# Altium PCB OSU_KBD.PcbDoc
Units mil, origin at the board's own origin, x right, y up, seen from the top; angles counter-clockwise.
Board outline 2362.2 x 2165.35 mil, 2 copper layers (Top Layer, Bottom Layer); 27 components, 22 nets, 142 pads, 14 vias.
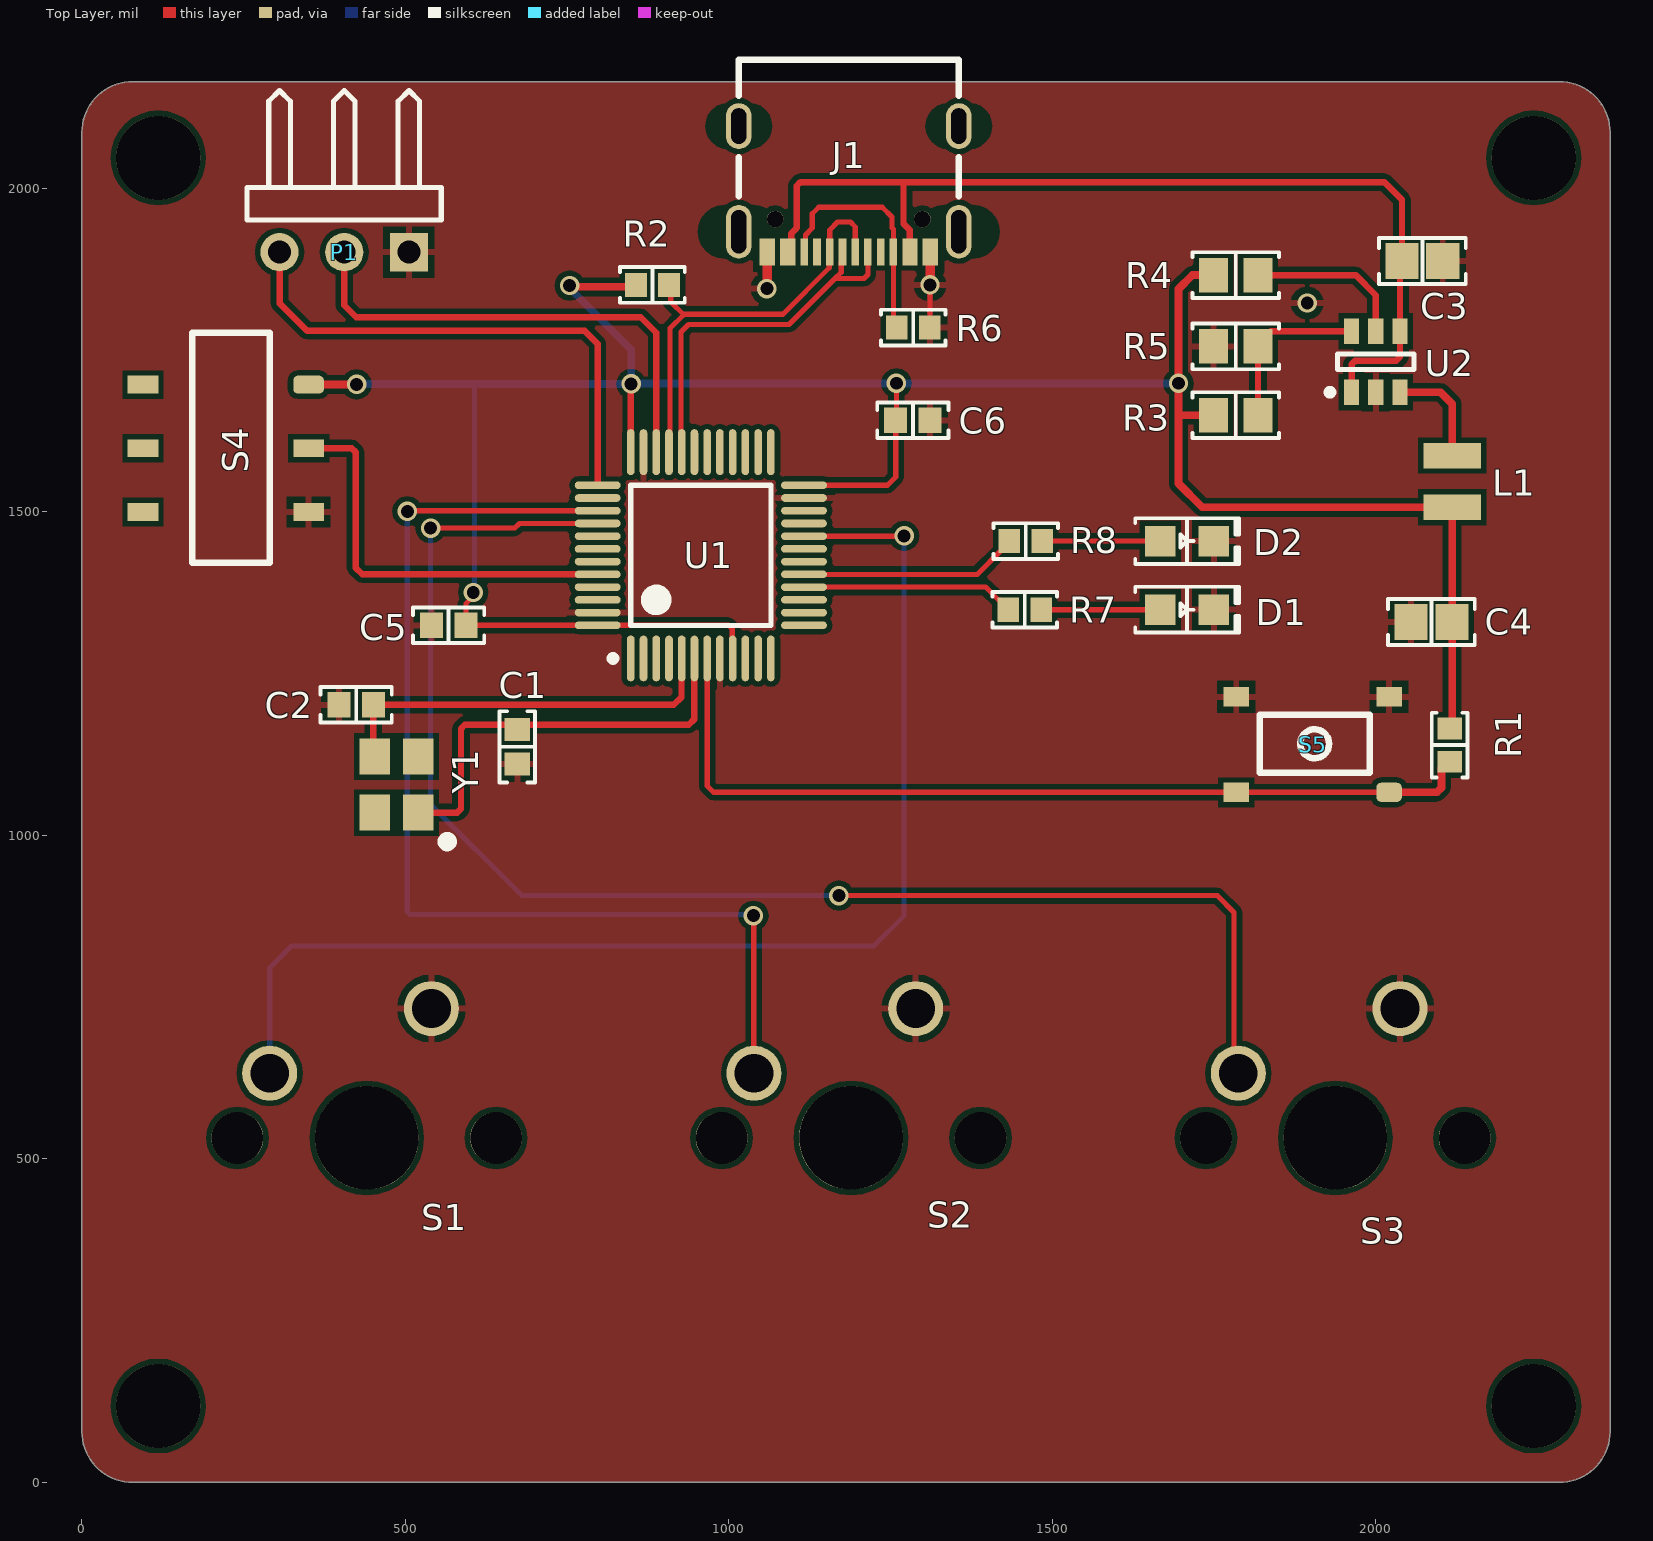
[diagram p0: Top Layer view]
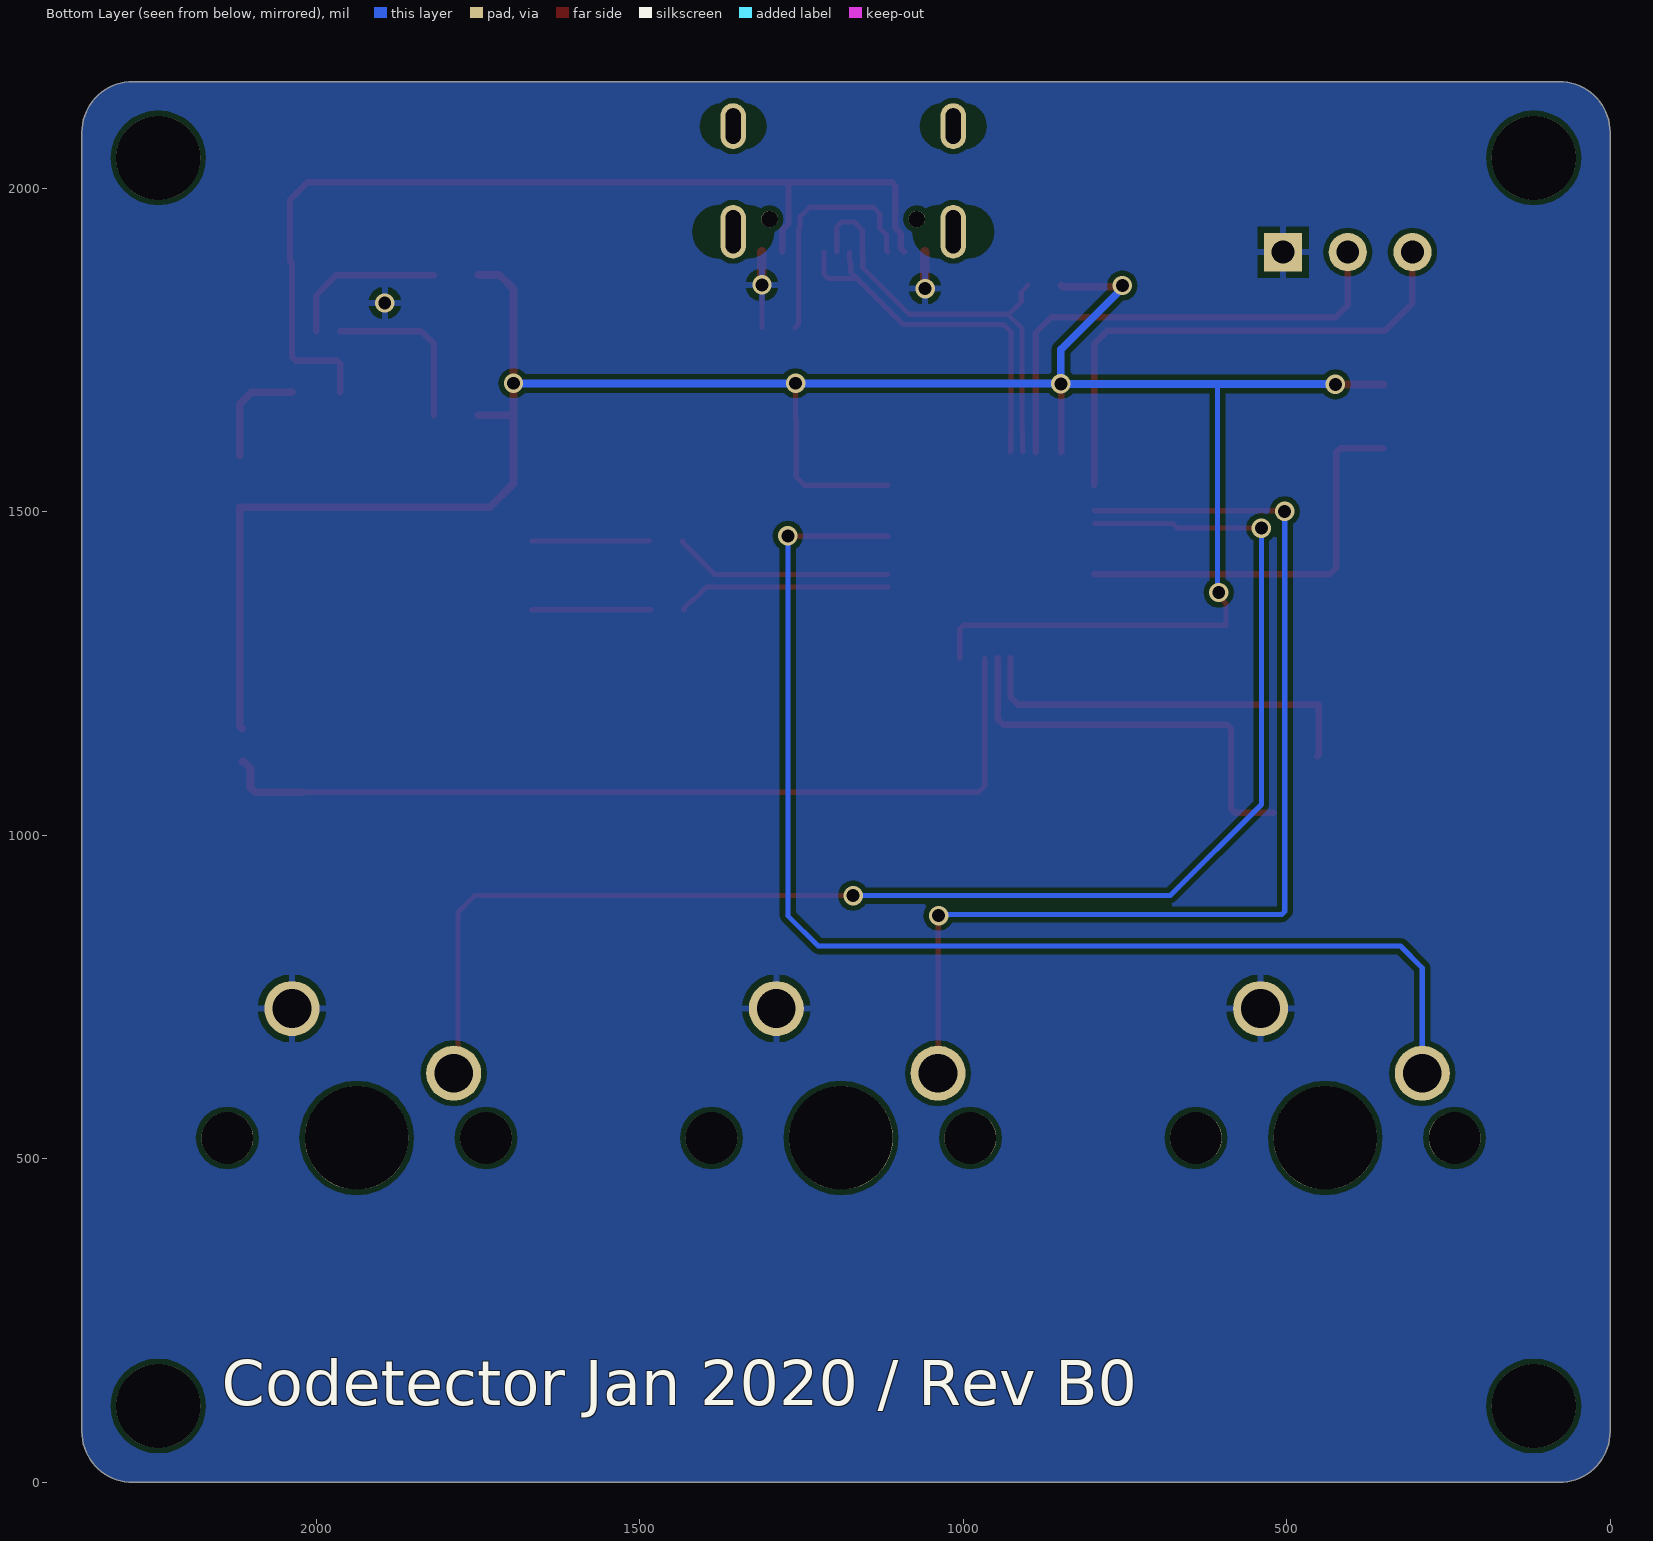
[diagram p1: Bottom Layer view, seen from below]
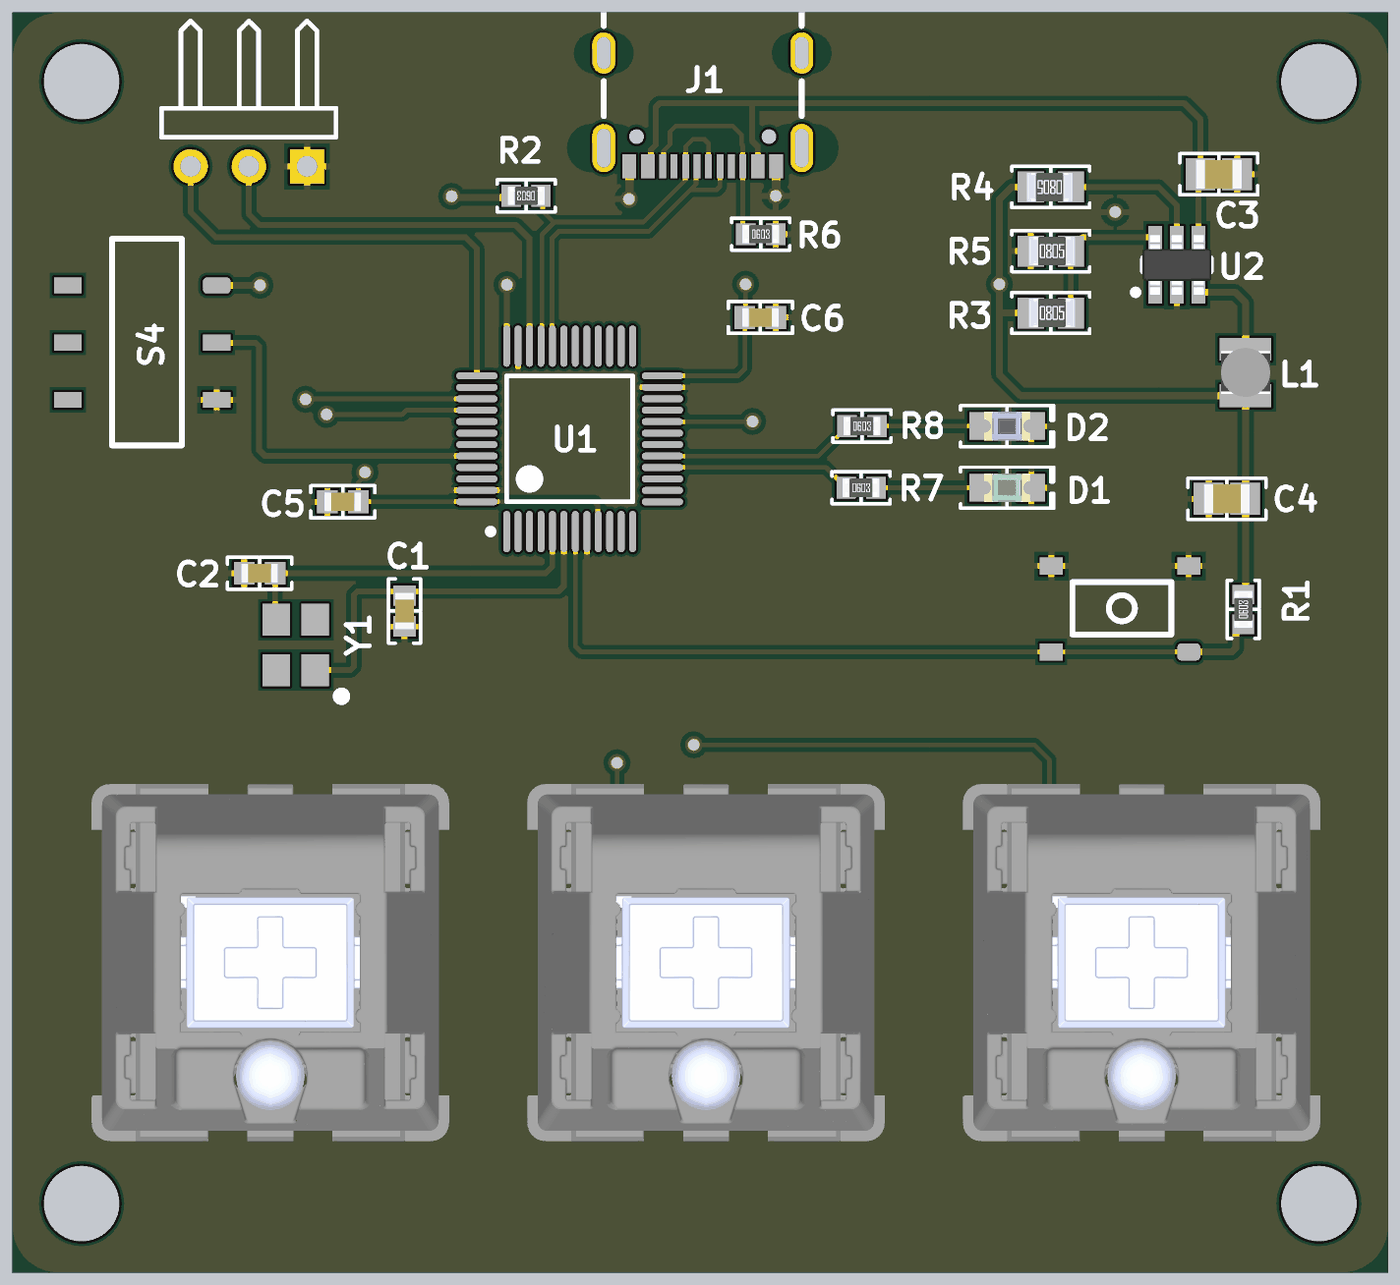
[diagram p2: 3D render of the assembled board from above, using the file's embedded part models]

## Layer stack, top to bottom
Top Solder: solder mask 0.4, Solder Resist, Dk 3.5
Top Layer: signal copper 1.4
Dielectric 1: dielectric 12.6, FR-4, Dk 4.8
Bottom Layer: signal copper 1.4
Bottom Solder: solder mask 0.4, Solder Resist, Dk 3.5

## Board outline
0,78.74 ccw(c78.74,78.74) 78.74,0 2283.46,0 ccw(c2283.46,78.74) 2362.2,78.74 2362.2,2086.61 ccw(c2283.46,2086.61) 2283.46,2165.35 78.74,2165.35 ccw(c78.74,2086.61) 0,2086.61

## Design rules (kind name [scope] priority, off if disabled: settings)
AssemblyTestPointUsage [All] p1: valid=2
Clearance [All] p1: gap=8 ignorepadtopadclearanceinfootprint=TRUE
DiffPairsRouting [All] p1: maxlimit=10 minlimit=8 mostfreqgap=10 toplayer_minwidth=8 toplayer_maxwidth=15 toplayer_prefwidth=10 bottomlayer_minwidth=8 bottomlayer_maxwidth=15 bottomlayer_prefwidth=10 maxuncoupledlength=500
FabricationTestPointUsage [All] p1: valid=2 allowmultiple=FALSE
HoleSize [All] p1: absolutevalues=TRUE maxlimit=500 minlimit=1 maxpercent=80.000 minpercent=20.000
MinimumSolderMaskSliver [All] p1: minsoldermaskwidth=0
PolygonConnect [All] p1: connectstyle=Relief reliefconductorwidth=10 reliefentries=4 polygonreliefangle="90 Angle" airgapwidth=10
RoomDefinition osu_keyboard [InComponentClass('osu_keyboard')] p1: selectionmemoryflags=8 confinementstyle=ConfineIn formatcopy=TRUE lockcomponents=FALSE outline 55.12,94.49 2259.84,94.49 2259.84,2216.54 55.12,2216.54
RoutingVias [All] p1: holewidth=20 width=30 viastyle="Through Hole" minholewidth=14 minwidth=28 maxholewidth=30 maxwidth=50
SilkToSilkClearance [All] p1: silktosilkclearance=5
SilkToSolderMaskClearance [IsPad] p1: minsilkscreentomaskgap=1 clearancetoexposedcopper=TRUE
SolderMaskExpansion [All] p1: expansion=4 istentingtop=FALSE
Width [All] p1: maxlimit=30 minlimit=8 preferedwidth=10 minimp=50.000000 maximp=50.000000 favimp=50.000000
23 further rules are at their usual default settings.

## Classes and differential pairs
differential pair USBD: +USBD_P -USBD_N

## Components (designator, comment, footprint, x,y, rotation, side; value= is the part's Value field where it differs from the comment)
C1 "22pF" "CAP 0603/1608" 673,1137 r90 top
C2 "22pF" "CAP 0603/1608" 424,1202 r180 top
C3 "10uF" "CAP 0805/2012" 2072,1888 r180 top
C4 "22uF" "CAP 0805/2012" 2086,1330 r0 top
C5 "0.1uF" "CAP 0603/1608" 566.93,1324.8 r0 top
C6 "0.1uF" "CAP 0603/1608" 1284.45,1641.73 r180 top
D1 "Green" "LED 0805/2012 GREEN" 1708.31,1349 r0 top
D2 "Blue" "LED 0805/2012 BLUE" 1708.31,1455 r0 top value=Green
J1 "USB Type C Female" "USB Type C Female" 1185.43,1933.07 r180 top
L1 "2.2 uH" INDP1722X10N 2118.11,1547.24 r270 top
P1 "Header 3H" HDR1X3H 505.51,1901.57 r180 top
R1 "1k" "RES 0603/1608" 2114.17,1139.76 r90 top
R2 "1.5k" "RES 0603/1608" 882,1851 r180 top
R3 "20k" "RES 0805/2012" 1783.46,1649.61 r0 top
R4 "10k" "RES 0805/2012" 1783.46,1866.14 r180 top
R5 "4.42k" "RES 0805/2012" 1783.46,1755.91 r0 top
R6 "1k" "RES 0603/1608" 1285,1785 r0 top
R7 "330" "RES 0603/1608" 1457.41,1349 r0 top
R8 "330" "RES 0603/1608" 1459,1455 r0 top
S1 "CherryMXSwitch" CherryMX 440.35,532.48 r0 top
S2 "CherryMXSwitch" CherryMX 1188.88,532.48 r0 top
S3 "CherryMXSwitch" CherryMX 1937.4,532.48 r0 top
S4 "XKB-SK3245S-L3-A" XKB-SK-3245S 350.39,1696.85 r270 top
S5 "XKB-TS-1187A" XKB-RS-1187A 1905.51,1141.73 r180 top
U1 "STM32F103C8T6" STM-LQFP48_N 956.69,1433.07 r90 top
U2 "JW5223" SOT23-6N 2000,1732.28 r90 top
Y1 "8MHz" TAXM_SMD_CRYSTAL 519.68,1035.43 r90 top

## Footprints (in the part's own frame and the unit in brackets; to place one, negate y for a bottom-side part, rotate by r counter-clockwise, add the part's x,y. Pads: shape width x height; smd on the part's side, far side on the other; paste and mask are expansions set on the pad)
"CAP 0603/1608" [mm] "Chip Capacitor, 2-Leads, Body 1.60x0.80mm, IPC Medium Density"
  rect 0.9x1 smd: 1(-0.675,0) 2(0.675,0)
  silkscreen extent -1.4,-0.7 1.4,0.7, body extent -0.8,-0.41 0.8,0.41, height 0.82
"CAP 0805/2012" [mm] "Chip Capacitor, 2-Leads, Body 2.00x1.20mm, IPC Medium Density"
  rect 1.3x1.4 smd: 1(-0.8,0) 2(0.8,0)
  silkscreen extent -1.7,-0.9 1.7,0.9, body extent -1,-0.64 1,0.64, height 1.26
CherryMX [mil]
  round 85 hole 60: 1(-150,100) 2(100,200)
  round 80 hole 80 unplated: ""(-200,0) ""(200,0)
  round 160 hole 160 unplated: ""(0,0)
  body extent -305,-307 309,307, height 620
HDR1X3H [mm] "Connector; Header; 3 Position; Right Angle"
  rect 1.5x1.5 hole 0.9: 1(0,0)
  round 1.5 hole 0.9: 2(2.54,0) 3(5.08,0)
  silkscreen extent -1.27,-6.35 6.35,-1.27
INDP1722X10N [mm] "Precision Wire Wound Inductor, 2-Leads, Body 1.67x2.15mm, IPC Medium Density"
  rect 1x2.25 smd: 1(-1.016,0) 2(1.016,0)
  body extent -1.07,-1.07 1.07,1.07, height 1.1
"LED 0805/2012 BLUE" [mm] "Chip Diode, 2-Leads, Body 2.00x1.25mm, IPC Medium Density"
  rect 1.2x1.2 smd: 1(-1.05,0) 2(1.05,0)
  silkscreen extent -2.03,-0.9 2.03,0.9, body extent -1,-0.62 1,0.63, height 0.9
"LED 0805/2012 GREEN" [mm] "Chip Diode, 2-Leads, Body 2.00x1.25mm, IPC Medium Density"
  rect 1.2x1.2 smd: 1(-1.05,0) 2(1.05,0)
  silkscreen extent -2.03,-0.9 2.03,0.9, body extent -1,-0.62 1,0.63, height 0.9
"RES 0603/1608" [mm] "Chip Resistor, 2-Leads, Body 1.60x0.80mm, IPC Medium Density"
  rect 0.85x0.95 smd: 1(-0.65,0) 2(0.65,0)
  silkscreen extent -1.27,-0.7 1.27,0.7, body extent -0.8,-0.4 0.8,0.4, height 0.45
"RES 0805/2012" [mm] "Chip Resistor, 2-Leads, Body 2.00x1.25mm, IPC Medium Density"
  rect 1.15x1.35 smd: 1(-0.875,0) 2(0.875,0)
  silkscreen extent -1.7,-0.9 1.7,0.9, body extent -0.95,-0.62 1.05,0.63, height 0.6
SOT23-6N [mm] "SOT23, 6-Leads, Body 2.90x2.45mm, Pitch 0.95mm, IPC Medium Density"
  rect 1x0.6 smd: 1(-1.2,0.95) 2(-1.2,0) 3(-1.2,-0.95) 4(1.2,-0.95) 5(1.2,0) 6(1.2,0.95)
  silkscreen extent -1.32,-1.5 0.3,1.92, body extent -1.3,-1.5 1.3,1.5, height 1.1
STM-LQFP48_N [mm] "QFP, 48-Leads, Body 7x7mm, Pitch 0.5mm, IPC Medium Density"
  oval 1.8x0.3 smd: 1(-4.05,2.75) 2(-4.05,2.25) 3(-4.05,1.75) 4(-4.05,1.25) 5(-4.05,0.75) 6(-4.05,0.25) 7(-4.05,-0.25) 8(-4.05,-0.75) 9(-4.05,-1.25) 10(-4.05,-1.75) 11(-4.05,-2.25) 12(-4.05,-2.75) 25(4.05,-2.75) 26(4.05,-2.25) 27(4.05,-1.75) 28(4.05,-1.25) 29(4.05,-0.75) 30(4.05,-0.25) 31(4.05,0.25) 32(4.05,0.75) 33(4.05,1.25) 34(4.05,1.75) 35(4.05,2.25) 36(4.05,2.75)
  oval 0.3x1.8 smd: 13(-2.75,-4.05) 14(-2.25,-4.05) 15(-1.75,-4.05) 16(-1.25,-4.05) 17(-0.75,-4.05) 18(-0.25,-4.05) 19(0.25,-4.05) 20(0.75,-4.05) 21(1.25,-4.05) 22(1.75,-4.05) 23(2.25,-4.05) 24(2.75,-4.05) 37(2.75,4.05) 38(2.25,4.05) 39(1.75,4.05) 40(1.25,4.05) 41(0.75,4.05) 42(0.25,4.05) 43(-0.25,4.05) 44(-0.75,4.05) 45(-1.25,4.05) 46(-1.75,4.05) 47(-2.25,4.05) 48(-2.75,4.05)
  silkscreen extent -4.17,-2.75 2.75,3.57, body extent -3.5,-3.5 3.5,3.5, height 1.6
TAXM_SMD_CRYSTAL [mm]
  rect 1.4x1.2 smd: 1(0,0) 2(2.2,0) 3(2.2,1.7) 4(0,1.7)
  silkscreen extent -1.32,-1.32 -0.96,-0.96
"USB Type C Female" [mm]
  rect 0.6x1.05 smd mask+0.09: 1(-3.2,0.791) 2(-2.4,0.791) 11(2.4,0.791) 12(3.2,0.791)
  rect 0.3x1.05 smd mask+0.09: 3(-1.75,0.791) 4(-1.25,0.791) 5(-0.75,0.791) 6(-0.25,0.791) 7(0.25,0.791) 8(0.75,0.791) 9(1.25,0.791) 10(1.75,0.791)
  oval 1x2.1 hole 1.7 slot 0.6 at 0 deg: ""(-4.32,0) ""(4.32,0)
  oval 1x1.8 hole 1.4 slot 0.6 at 0 deg: ""(-4.32,-4.15) ""(4.32,-4.15)
  round 0.65 hole 0.65 unplated: ""(-2.89,-0.5) ""(2.89,-0.5)
  silkscreen extent -4.32,-6.75 4.32,-1.4
XKB-RS-1187A [mm]
  rrect50% 1x0.75 smd: 1(-2.921,1.905)
  rect 1x0.75 smd: 2(3.079,1.905) 3(-2.921,-1.845) 4(3.079,-1.845)
  silkscreen extent -2.16,-1.14 2.16,1.14
XKB-SK-3245S [mm]
  rrect50% 0.7x1.2 smd: 1(0,0)
  rect 0.7x1.2 smd: 2(2.5,0) 3(5,0) 4(0,-6.5) 5(2.5,-6.5) 6(5,-6.5)
  silkscreen extent -2.03,-4.57 6.99,-1.52

## Part data
C1 C2: library part C1608C0G1H220J080AA, "CAP CER 22PF 50V C0G 0603", Device Package="0603 (1608 Metric)", Manufacturer="TDK Corporation", Supplier Part Number 1=445-1273-1-ND, TemperatureCoefficient="C0G, NP0", TemperatureRange="-55C ~ 125C", Tolerance=5%, Voltage=50V, ComponentLink1Description=Datasheet, ComponentLink1URL=https://product.tdk.com/info/en/catalog/datasheets/mlcc_commercial_general_en.pdf, ComponentLink2Description="Digi-Key listing", ComponentLink2URL=http://digikey.com/product-detail/en/C1608C0G1H220J080AA/445-1273-1-ND/567670, Part Number=C1608C0G1H220J080AA, PartId=4031, Price=0.14, Supplier 1=Digi-Key, Type=-
C3: library part C2012X5R0J106K125AB, "CAP CER 10UF 6.3V X5R 0805", Device Package="0805 (2012 Metric)", Manufacturer="TDK Corporation", Supplier Part Number 1=445-4113-2-ND, TemperatureCoefficient=X5R, TemperatureRange="-55C ~ 85C", Tolerance=10%, Voltage=6.3V, ComponentLink1Description=Datasheet, ComponentLink1URL=https://product.tdk.com/info/en/catalog/datasheets/mlcc_commercial_general_en.pdf, ComponentLink2Description="Digi-Key listing", ComponentLink2URL=http://digikey.com/product-detail/en/C2012X5R0J106K125AB/445-4113-2-ND/1975460, Part Number=C2012X5R0J106K125AB, PartId=4503, Price=0.0486, Supplier 1=Digi-Key, Type=-
C4: library part C0805C226M9PACTU, "CAP CER 22UF 6.3V X5R 0805", Device Package="0805 (2012 Metric)", Manufacturer=Kemet, Supplier Part Number 1=399-4696-2-ND, TemperatureCoefficient=X5R, TemperatureRange="-55C ~ 85C", Tolerance=20%, Voltage=6.3V, ComponentLink1Description=Datasheet, ComponentLink1URL=http://www.kemet.com/docfinder?Partnumber=C0805C226M9PACTU, ComponentLink2Description="Digi-Key Listing", ComponentLink2URL=https://www.digikey.com/product-detail/en/kemet/C0805C226M9PACTU/399-4696-2-ND/992189, Part Number=C0805C226M9PACTU, PartId=13904, Price=0.076, Supplier 1=Digi-Key
C5 C6: library part C1608X7R1E104K080AA, "CAP CER 0.1UF 25V X7R 0603", Device Package="0603 (1608 Metric)", Manufacturer="TDK Corporation", Supplier Part Number 1=445-1316-1-ND, TemperatureCoefficient=X7R, TemperatureRange="-55C ~ 125C", Tolerance=10%, Voltage=25V, ComponentLink1Description=Datasheet, ComponentLink1URL=https://product.tdk.com/info/en/catalog/datasheets/mlcc_commercial_general_en.pdf, ComponentLink2Description="Digi-Key listing", ComponentLink2URL=http://digikey.com/product-detail/en/C1608X7R1E104K080AA/445-1316-1-ND/567697, Part Number=C1608X7R1E104K080AA, PartId=4029, Price=0.14, Supplier 1=Digi-Key, Type=-
D1: library part LTST-C171KGKT, "LED GREEN CLEAR 0805 SMD", Current (Test)=20mA, Device Package="0805 (2012 Metric)", Manufacturer="Lite-On Inc.", Supplier Part Number 1=160-1426-2-ND, Voltage Forward=2V, Colour=Green, ComponentLink1Description=Datasheet, ComponentLink1URL=http://optoelectronics.liteon.com/upload/download/DS22-2000-118/S_110_LTST-C171KGKT.pdf, ComponentLink2Description="Digi-Key Listing", ComponentLink2URL=http://www.digikey.ca/product-detail/en/LTST-C171KGKT/160-1426-2-ND/386799, Lens Transparency=Clear, Millicandela=35mcd, Part Number=LTST-C171KGKT, PartId=7080, Price=0.0638, Supplier 1=Digi-Key, Type="Surface Mount", Viewing Angle=130
D2: library part LTST-C171TBKT, "LED BLUE CLEAR 0805 SMD", Current (Test)=20mA, Device Package="0805 (2012 Metric)", Manufacturer="Lite-On Inc.", Supplier Part Number 1=160-1645-2-ND, Voltage Forward=3.3V, Colour=Blue, ComponentLink1Description=Datasheet, ComponentLink1URL=http://optoelectronics.liteon.com/upload/download/DS22-2000-233/S_110_LTST-C171TBKT(0630).pdf, ComponentLink2Description="Digi-Key Listing", ComponentLink2URL=http://www.digikey.ca/product-detail/en/LTST-C171TBKT/160-1645-2-ND/388528, Lens Transparency=Clear, Millicandela=104mcd, Part Number=LTST-C171TBKT, PartId=7084, Price=0.0939, Supplier 1=Digi-Key, Type="Surface Mount", Viewing Angle=130
L1: library part UHP252010NF, "Inductor 2.2uH"
P1: "Header, 3-Pin, Right Angle", LatestRevisionDate=17-Jul-2002, LatestRevisionNote="Re-released for DXP Platform.", Publisher="Altium Limited"
R1: library part ERJ-3EKF1001V, "RES SMD 1K OHM 1% 1/10W 0603", Device Package="0603 (1608 Metric)", Manufacturer="Panasonic Electronic Components", PowerRating="0.1W, 1/10W", Supplier Part Number 1=P1.00KHTR-ND, TemperatureCoefficient=100ppm/C, TemperatureRange="-55C ~ 155C", Tolerance=1%, ComponentLink1Description=Datasheet, ComponentLink1URL=http://industrial.panasonic.com/www-cgi/jvcr13pz.cgi?E+PZ+3+AOA0002+ERJ3EKF1001V+7+WW, ComponentLink2Description="Digi-Key listing", ComponentLink2URL=http://digikey.com/product-detail/en/ERJ-3EKF1001V/P1.00KHTR-ND/196032, Part Number=ERJ-3EKF1001V, PartId=885, Price=0.0038, Supplier 1=Digi-Key, Type="Thick Film"
R2: library part ERA-3ARW152V, "RES SMD 1.5KOHM 0.05% 1/10W 0603", Device Package="0603 (1608 Metric)", Manufacturer="Panasonic Electronic Components", PowerRating="0.1W, 1/10W", Supplier Part Number 1=P1.5KBETR-ND, TemperatureCoefficient=10ppm/C, TemperatureRange="-55C ~ 155C", Tolerance=0.05%, ComponentLink1Description=Datasheet, ComponentLink1URL=http://industrial.panasonic.com/lecs/www-data/pdf/AOA0000/AOA0000CE26.pdf, ComponentLink2Description="Digi-Key listing", ComponentLink2URL=http://digikey.com/product-detail/en/ERA-3ARW152V/P1.5KBETR-ND/3073692, Part Number=ERA-3ARW152V, PartId=1863, Price=0.3659, Supplier 1=Digi-Key, Type="Thin Film"
R3: library part ERA-6AEB203V, "RES SMD 20K OHM 0.1% 1/8W 0805", Device Package="0805 (2012 Metric)", Manufacturer="Panasonic Electronic Components", PowerRating="0.125W, 1/8W", Supplier Part Number 1=P20KDATR-ND, TemperatureCoefficient=25ppm/C, TemperatureRange="-55C ~ 155C", Tolerance=0.1%, ComponentLink1Description=Datasheet, ComponentLink1URL=http://industrial.panasonic.com/lecs/www-data/pdf/AOA0000/AOA0000CE26.pdf, ComponentLink2Description="Digi-Key listing", ComponentLink2URL=http://digikey.com/product-detail/en/ERA-6AEB203V/P20KDATR-ND/1465780, Part Number=ERA-6AEB203V, PartId=2456, Price=0.0653, Supplier 1=Digi-Key, Type="Thin Film"
R4: library part ERA-6AEB103V, "RES SMD 10K OHM 0.1% 1/8W 0805", Device Package="0805 (2012 Metric)", Manufacturer="Panasonic Electronic Components", PowerRating="0.125W, 1/8W", Supplier Part Number 1=P10KDATR-ND, TemperatureCoefficient=25ppm/C, TemperatureRange="-55C ~ 155C", Tolerance=0.1%, ComponentLink1Description=Datasheet, ComponentLink1URL=http://industrial.panasonic.com/lecs/www-data/pdf/AOA0000/AOA0000CE26.pdf, ComponentLink2Description="Digi-Key listing", ComponentLink2URL=http://digikey.com/product-detail/en/ERA-6AEB103V/P10KDATR-ND/1465773, Part Number=ERA-6AEB103V, PartId=2446, Price=0.0653, Supplier 1=Digi-Key, Type="Thin Film"
R5: library part ERA-6AEB4421V, "RES SMD 4.42K OHM 0.1% 1/8W 0805", Device Package="0805 (2012 Metric)", Manufacturer="Panasonic Electronic Components", PowerRating="0.125W, 1/8W", Supplier Part Number 1=P4.42KDATR-ND, TemperatureCoefficient=25ppm/C, TemperatureRange="-55C ~ 155C", Tolerance=0.1%, ComponentLink1Description=Datasheet, ComponentLink1URL=http://industrial.panasonic.com/lecs/www-data/pdf/AOA0000/AOA0000CE26.pdf, ComponentLink2Description="Digi-Key listing", ComponentLink2URL=http://digikey.com/product-detail/en/ERA-6AEB4421V/P4.42KDATR-ND/2025721, Part Number=ERA-6AEB4421V, PartId=2618, Price=0.0653, Supplier 1=Digi-Key, Type="Thin Film"
R6: library part ERJ-3EKF1001V, "RES SMD 1K OHM 1% 1/10W 0603", Manufacturer="Panasonic Electronic Components", PowerRating="0.1W, 1/10W", Supplier Part Number 1=P1.00KHTR-ND, TemperatureCoefficient=100ppm/C, TemperatureRange="-55C ~ 155C", Tolerance=1%, ComponentLink1Description=Datasheet, ComponentLink1URL=http://industrial.panasonic.com/www-cgi/jvcr13pz.cgi?E+PZ+3+AOA0002+ERJ3EKF1001V+7+WW, ComponentLink2Description="Digi-Key listing", ComponentLink2URL=http://digikey.com/product-detail/en/ERJ-3EKF1001V/P1.00KHTR-ND/196032, Part Number=ERJ-3EKF1001V, PartId=885, Price=0.0038, Supplier 1=Digi-Key, Type="Thick Film"
R7 R8: library part ERJ-PA3F3300V, "RES SMD 330 OHM 1% 1/4W 0603", Device Package="0603 (1608 Metric)", Manufacturer="Panasonic Electronic Components", PowerRating="0.25W, 1/4W", Supplier Part Number 1=P330BYTR-ND, TemperatureCoefficient=100ppm/C, TemperatureRange="-55C ~ 155C", Tolerance=1%, ComponentLink1Description=Datasheet, ComponentLink1URL=http://industrial.panasonic.com/www-cgi/jvcr17pz.cgi?E+PZ+4+AOA0004+ERJPA3F3300V+WW, ComponentLink2Description="Digi-Key listing", ComponentLink2URL=http://digikey.com/product-detail/en/ERJ-PA3F3300V/P330BYTR-ND/5035908, Part Number=ERJ-PA3F3300V, PartId=1800, Price=0.0255, Supplier 1=Digi-Key, Type="Thick Film"
S1 S2 S3: "CherryMX Switch"
S4: "Toggle Switch"
S5: "Push Button"
U1: "ARM Cortex-M3 32-bit MCU, 64 KB Flash, 20 KB Internal RAM, 37 I/Os, 48-pin LQFP, -40 to 85 degC, Tray", I/Os (High Current)=37, Operating Frequency(F) (Processor speed) (MHz)=72, Supplier Part Number 1=497-6063-ND, Supply Voltage(Vcc) min (V)=2, A/D Converter="2x12-bit (10 Channel)", ComponentLink1Description="Manufacturer URL", ComponentLink1URL=http://www.st.com/web/en/home.html, ComponentLink2Description=Datasheet, ComponentLink2URL=http://www.st.com/st-web-ui/static/active/en/resource/technical/document/datasheet/CD00161566.pdf, ComponentLink3Description="Package Specification", ComponentLink3URL=http://www.st.com/st-web-ui/static/active/en/resource/technical/document/datasheet/DM00058181.pdf, Core="ARM Cortex-M3", DatasheetVersion="Rev. 16", FLASH Size (Prog) (kB)=64, Internal RAM Size (kB)=20, Mounting Technology="Surface Mount", PackageDescription="48-Pin Low Profile Quad Flat Package, 7 x 7 mm Body, 0.5 mm Pitch", PackageReference=LQFP48, PackageVersion="Rev. 6, 06/2013", Packing=Tray, PartNumber=STM32F103C8T6, Supplier 1=Digi-Key, Supplier 2=Farnell, Supplier 3=Newark, Supplier 4=Newark, Supplier 5=Mouser, Supplier Part Number 2=1447637, Supplier Part Number 3=59M2182, Supplier Part Number 4=57P1222, Supplier Part Number 5=511-STM32F103C8T6
U2: "SMPS Buck", ComponentLink1Description=Datasheet, ComponentLink1URL=https://datasheet.lcsc.com/szlcsc/1909111631_JoulWatt-Tech-JW5223_C185110.pdf

## Free pads (board coordinates)
  round 129.92 hole 129.92 unplated: ""(118.11,118.11) ""(118.11,2047.24) ""(2244.09,118.11) ""(2244.09,2047.24)

## Via types
v1: diameter 30, hole 20, Top Layer to Bottom Layer, tented both sides, 14 vias

## Nets (pads, with @x,y where several pads share a name; then routed paths per layer and width w, separated by ;. In a path a pad name is that pad's centre, name@x,y a point inside that pad or via, vN(x,y) a via of type N, cw(c..) or ccw(c..) an arc to the next point about the centre after c; other vN are vias at no path point)
3V3: C4.2 C5.2 C6.2 L1.2 R1.2 R2.2 R3.1 R4.2 S4.1 U1.9 U1.24 U1.36 U1.48 | length 4069.2
  Top Layer w8: v1(605,1375.54) 605,1369.59 593.5,1358.09 C5.2 U1.48 999.31,1324.8 1005.18,1318.94 1005.18,1274.35 U1.9 ; U1.24 1245.34,1541.34 1257.87,1553.87 C6.2 1259,1642.86 v1(1259,1699)
  Top Layer w10: U1.36 v1@848.43,1697.43
  Top Layer w12: S4.1 350.54,1696.99 424.46,1696.99 v1(424.61,1697.13) ; v1(754,1850) 756,1848 846.03,1848 R2.2@848.43,1850.39 ; v1@848.43,1697.43 v1(849,1698) ; R3.1 1695,1649.61 ; R4.2 1716.54,1866.14 1695,1844.61 v1(1695,1699) 1695,1649.61 ; R1.2 2118.11,1169.29 2118.11,1330 2118.11,1389.76 L1.2 1731.76,1507.24 1695,1544 1695,1649.61
  Bottom Layer w8: v1(605,1375.54) 607,1377.54 607,1698
  Bottom Layer w12: v1(424.61,1697.13) 425.47,1698 607,1698 v1(849,1698) ; v1(754,1850) 754,1846 849,1751 v1(849,1698) ; v1(1695,1699) 1694.5,1698.5 849.5,1698.5 v1(849,1698)
+5: C3.2 J1.2 J1.11 U2.1 U2.4 | length 1536.2
  Top Layer w10: J1.11 1096.29,1907.29 1096.29,1930.29 1105,1939 1105,2004.14 1110.86,2010 1270,2010 ; J1.2 1279.92,1935.57 1270,1945.49 1270,2010 ; U2.1 1962.6,1728.14 1968.46,1734 2031.54,1734 2037.4,1739.86 U2.4 2037.4,1884.9 C3.2 2040.5,1982.5 2013,2010 1270,2010
GND: C1.1 C2.2 C3.1 C4.1 C5.1 C6.1 D1.2 D2.2 J1.1 J1.12 P1.1 R5.1 R6.2 S1.2 S2.2 S3.2 S4.3 S5.3 S5.4 U1.8 U1.23 U1.35 U1.47 U2.2 | length 174.2
  Top Layer w8: v1(1058.79,1845.28) v1@1059.45,1845.94 ; R6.2 1311,1785.41 v1(1311,1851) v1@1311.42,1851.42
  Top Layer w15: v1@1059.45,1845.94 J1.12 ; v1@1311.42,1851.42 J1.1
  other v1: 1894,1823
NetC1_2: C1.2 U1.6 Y1.1 | length 653.3
  Top Layer w10: Y1.1 580.14,1035.43 586,1041.29 586,1165.14 591.86,1171 937.94,1171 946.85,1179.91 U1.6
NetC2_1: C2.1 U1.5 Y1.3 | length 621.9
  Top Layer w10: Y1.3 450.57,1124.23 C2.1 915,1202 926.82,1213.82 926.82,1273.28 U1.5
NetD1_1: D1.1 R7.2 | length 184
  Top Layer w8: R7.2 D1.1
NetD2_1: D2.1 R8.2 | length 182.4
  Top Layer w8: R8.2 D2.1
NetJ1_3: J1.3 J1.10 R6.1 | length 371.6
  Top Layer w8: J1.10 1118.32,1903.72 1118.32,1928.27 1129,1938.96 1129,1961 1139,1971 1237,1971 1252,1956 1252,1939.45 1254.33,1937.12 J1.3 1254.33,1790.08 R6.1
NetL1_1: L1.1 U2.3 | length 167.9
  Top Layer w12: U2.3 2099.96,1685.04 2118.11,1666.89 L1.1
NetR1_1: R1.1 S5.1 S5.2 U1.7 | length 1385.9
  Top Layer w8: U1.7 966.54,1076.47 976.27,1066.73 S5.2 S5.1
  Top Layer w12: S5.1 2094.44,1066.73 2101.47,1073.76 2101.47,1103.44 2112.2,1114.17 R1.1
NetR3_2: R3.2 R5.2 U2.6 | length 263.1
  Top Layer w10: R3.2 R5.2 1817.91,1759.84 1837.6,1779.53 U2.6
NetR4_1: R4.1 U2.5 | length 250.5
  Top Layer w10: R4.1 1968.86,1866.14 2000,1835 U2.5
NetR7_1: R7.1 U1.16 | length 331.3
  Top Layer w8: U1.16 1396.96,1383.86 1417.12,1363.7 1419.09,1363.7 1431.82,1350.97 R7.1
NetR8_1: R8.1 U1.17 | length 339.7
  Top Layer w8: U1.17 1383.92,1403.54 1420.68,1440.3 1433.41,1453.03 R8.1
NetS1_1: S1.1 U1.20 | length 1918.9
  Top Layer w8: U1.20 1269.6,1462.6 1270,1463 v1(1271,1463)
  Bottom Layer w8: S1.1 290.35,795.35 324,829 1224,829 1271,876 v1(1271,1463)
NetS2_1: S2.1 U1.39 | length 1694.6
  Top Layer w8: v1(503,1501) 504,1502 U1.39 ; v1(1038,876) 1038.44,875.56 1038.44,632.92 S2.1
  Bottom Layer w8: v1(503,1501) 503,882.69 507.69,878 1036,878 v1(1038,876)
NetS3_1: S3.1 U1.40 | length 2250.6
  Top Layer w8: v1(539,1475) 669,1475 676.28,1482.28 U1.40 ; v1(1170,907) 1755,907 1781,881 1781,638.88 S3.1
  Bottom Layer w8: v1(539,1475) 539,1048 680,907 v1(1170,907)
NetS4_2: S4.2 U1.44 | length 632.3
  Top Layer w10: S4.2 417.14,1598.43 423,1592.57 423,1413.86 433.31,1403.54 U1.44
SWCLK: P1.3 U1.37 | length 815.2
  Top Layer w10: P1.3 305.51,1822.49 348,1780 777,1780 797.24,1759.76 U1.37
SWDIO: P1.2 U1.34 | length 766.6
  Top Layer w10: P1.2 405.51,1819.49 424,1801 864,1801 887.8,1777.2 U1.34
USBD_N: J1.5 J1.7 U1.32 | length 592.2
  Top Layer w8: U1.32 926.44,1593.25 926.44,1625.47 926.28,1625.63 926.28,1778.28 937.76,1789.76 1092.9,1789.76 1164.14,1861 ; J1.7 1175.59,1887.06 1173.81,1885.28 1173.81,1870.67 1164.14,1861 ; J1.5 1214.96,1866.96 1209,1861 1164.14,1861
USBD_P: J1.6 J1.8 R2.1 U1.33 | length 680
  Top Layer w8: R2.1@899.61,1850.39 910.31,1839.69 910.31,1824.69 930.19,1804.81 ; U1.33 908.21,1593.25 908.21,1625.47 909.26,1626.52 909.26,1783.89 931.13,1805.76 1083.58,1805.76 1155.23,1877.41 1155.23,1899.49 1156,1900.26 1156,1936 1168,1948 1188,1948 1195.28,1940.72 J1.6
pads on no net: J1. J1.4 J1.9 S1. S2. S3. S4.4 S4.5 S4.6 U1.1 U1.2 U1.3 U1.4 U1.10 U1.11 U1.12 U1.13 U1.14 U1.15 U1.18 U1.19 U1.21 U1.22 U1.25 U1.26 U1.27 U1.28 U1.29 U1.30 U1.31 U1.38 U1.41 U1.42 U1.43 U1.45 U1.46 Y1.2 Y1.4

## Polygon pours and split planes (outlines as drawn)
GND on Top Layer "Top Layer - GND" (solid, pour order 0): 0,78.74 ccw(c78.74,78.74) 78.74,0 2283.46,0 ccw(c2283.46,78.74) 2362.2,78.74 2362.2,2086.61 ccw(c2283.46,2086.61) 2283.46,2165.35 78.74,2165.35 ccw(c78.74,2086.61) 0,2086.61
GND on Bottom Layer "Bottom Layer-GND" (solid, pour order 1): 0,78.74 ccw(c78.74,78.74) 78.74,0 2283.46,0 ccw(c2283.46,78.74) 2362.2,78.74 2362.2,2086.61 ccw(c2283.46,2086.61) 2283.46,2165.35 78.74,2165.35 ccw(c78.74,2086.61) 0,2086.61

## Silkscreen, mask and mechanical layers (free items; w line width, h text height)
Bottom Overlay:
  text "Codetector Jan 2020 / Rev B0" at 2145.63,96.08 h120
Mechanical 1:
  lines w20: 2362.2,78.74 cw(c2283.46,78.74) 2283.46,0 78.74,0 cw(c78.74,78.74) 0,78.74 0,2086.61 cw(c78.74,2086.61) 78.74,2165.35 2283.46,2165.35 cw(c2283.46,2086.61) 2362.2,2086.61 2362.2,78.74 ; 2362.2,78.74 2362.2,78.74